# Altium PCB STM32 INC.PcbDoc
Units mm, origin at the board's own origin, x right, y up, seen from the top; angles counter-clockwise.
Board outline 127 x 70.87 mm, 2 copper layers (Top Layer, Bottom Layer); 66 components, 57 nets, 239 pads, 24 vias.
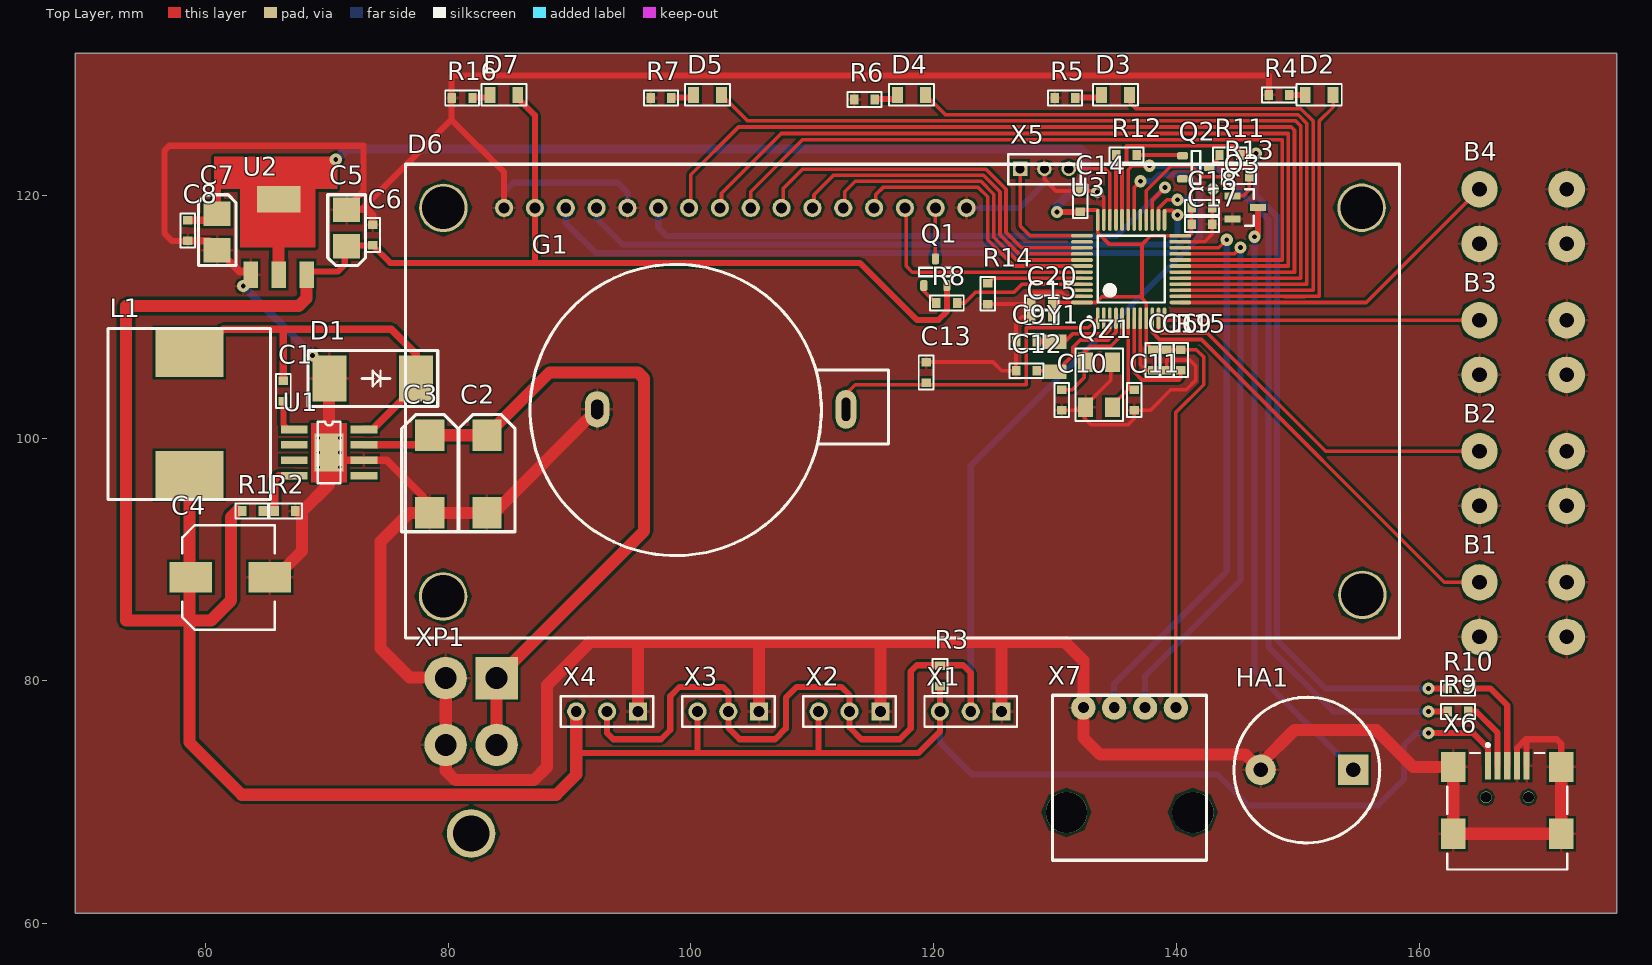
[diagram p0: Top Layer view]
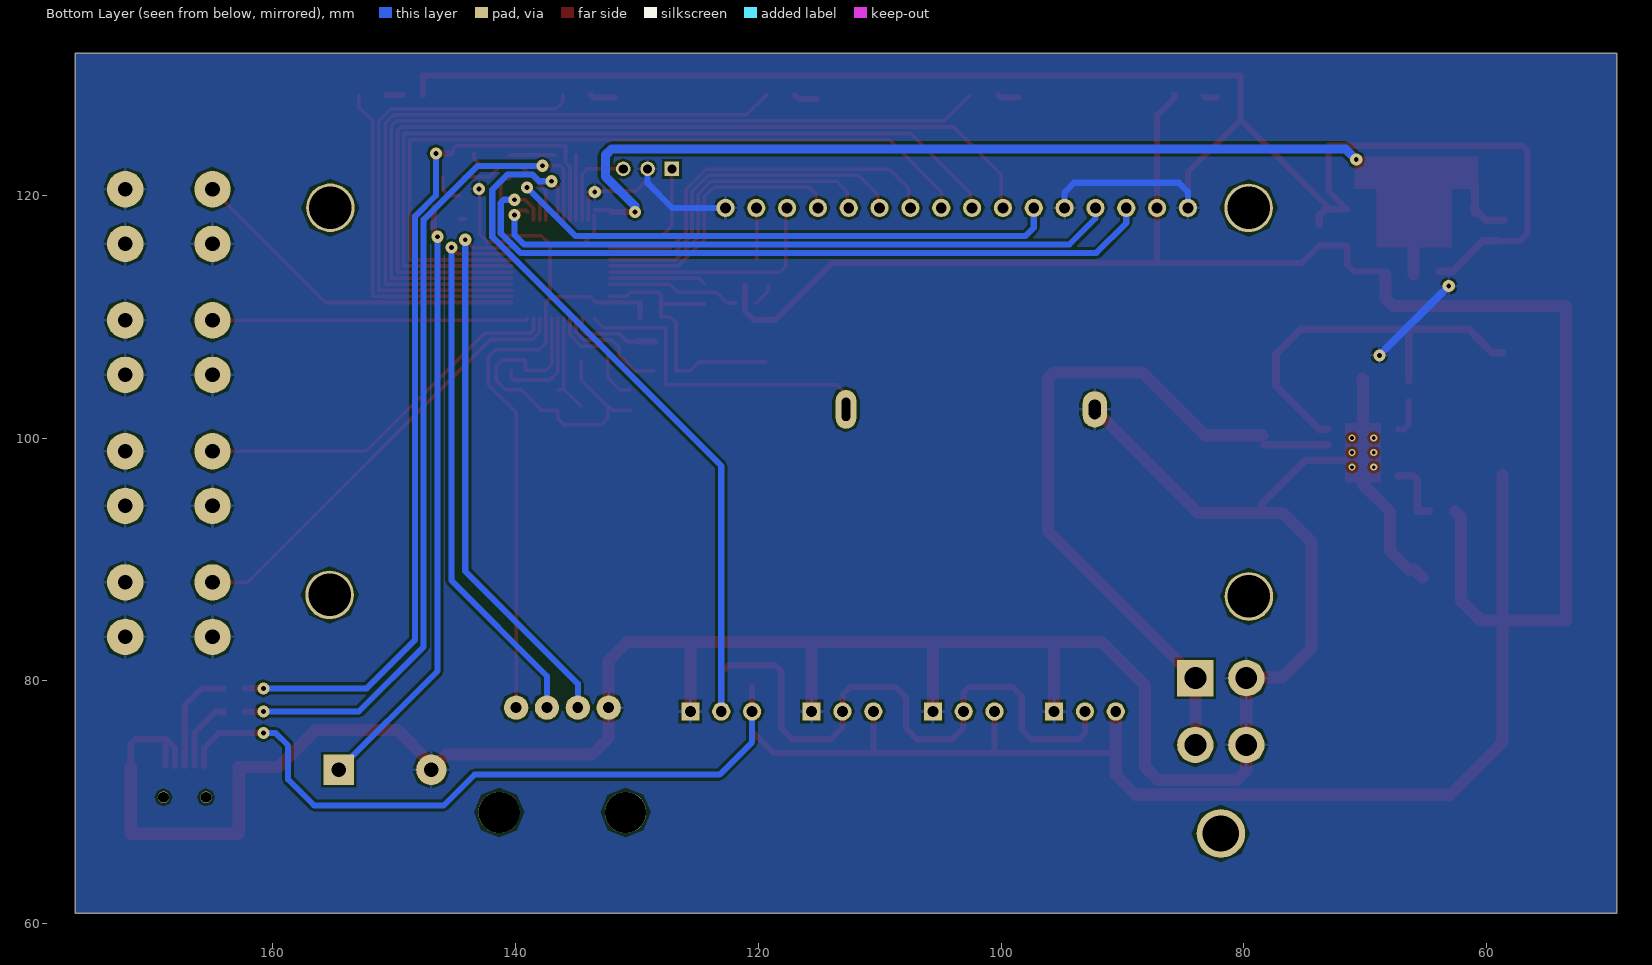
[diagram p1: Bottom Layer view, seen from below]

## Layer stack, top to bottom
Top Layer: signal copper 0.0356
Dielectric: dielectric 0.32, FR-4, Dk 4.8
Bottom Layer: signal copper 0.0356

## Board outline
49.276,60.833 49.276,131.699 176.276,131.699 176.276,60.833

## Design rules (kind name [scope] priority, off if disabled: settings)
Clearance [All] p1: gap=0.2
PolygonConnect [All] p1: connectstyle=Relief reliefconductorwidth=0.254 reliefentries=4 polygonreliefangle="90 Angle"
RoutingVias [All] p1: holewidth=0.711 width=1.27 viastyle="Through Hole" minholewidth=0.711 minwidth=1.27 maxholewidth=0.711 maxwidth=1.27
SilkscreenOverComponentPads [All] p1: minsilkscreentomaskgap=0.254
SolderMaskExpansion [All] p1: expansion=0.102
Width [All] p1: maxlimit=1 minlimit=0.254 preferedwidth=0.3
27 further rules are at their usual default settings.

## Classes and differential pairs
component class "STM32 INC": B1 B2 B3 B4 C1 C2 C3 C4 C8 C9 C10 C11 C12 C13 C14 C15 C16 C17 C18 C19 C20 D1 D2 D3 D4 D5 D7 G1 HA1 L1 Q1 Q2 Q3 QZ1 R1 R2 R4 R5 R6 R7 R9 R12 R13 R14 R15 U1 U3 X1 X2 X3 X4 X5 X7 XP1 Y1

## Components (designator, comment, footprint, x,y, rotation, side; value= is the part's Value field where it differs from the comment)
B1 "Button" Button 168.529,85.852 r180 top
B2 "Button" Button 168.529,96.647 r180 top
B3 "Button" Button 168.529,107.442 r180 top
B4 "Button" Button 168.529,118.237 r180 top
C1 "Capacitor" "Capacitor 0603" 66.421,103.886 r90 top
C2 "Capacitor Polar" "Capacitor D case" 83.185,97.028 r270 top
C3 "Capacitor Polar" "Capacitor D case" 78.486,97.028 r270 top
C4 "100uF" "Cap 0810" 58.801,88.519 r0 top
C5 "Capacitor Polar" "Capacitor B case" 71.628,117.297 r90 top
C6 "Capacitor" "Capacitor 0603" 73.787,116.713 r270 top
C7 "Capacitor Polar" "Capacitor B case" 60.96,116.967 r270 top
C8 "Capacitor" "Capacitor 0603" 58.547,117.094 r90 top
C9 "Capacitor" "Capacitor 0603" 127.635,107.95 r0 top
C10 "Capacitor" "Capacitor 0603" 130.556,103.124 r270 top
C11 "Capacitor" "Capacitor 0603" 136.525,103.124 r270 top
C12 "Capacitor" "Capacitor 0603" 127.635,105.537 r0 top
C13 "Capacitor" "Capacitor 0603" 119.38,105.41 r270 top
C14 "Capacitor" "Capacitor 0603" 132.08,119.507 r270 top
C15 "Capacitor" "Capacitor 0603" 128.905,109.982 r0 top
C16 "Capacitor" "Capacitor 0603" 138.068,106.426 r90 top
C17 "Capacitor" "Capacitor 0603" 142.113,117.602 r180 top
C18 "Capacitor" "Capacitor 0603" 142.113,118.999 r180 top
C19 "Capacitor" "Capacitor 0603" 139.211,106.426 r90 top
C20 "Capacitor" "Capacitor 0603" 128.905,111.125 r0 top
D1 "Diode schottky" SMC 77.343,104.902 r180 top
D2 "RED" "LED0805 RED" 151.765,128.27 r180 top
D3 "BLU" "LEDBLUE 00805" 134.969,128.27 r180 top
D4 "YEL" "LED0805 YELLOW" 118.174,128.27 r180 top
D5 "GRN" "LED0805 GREEN" 101.378,128.27 r180 top
D6 "LCD1602" LCD1602 117.094,100.838 r0 top
D7 "LED" "LED0805 GREEN" 84.582,128.27 r180 top
G1 "lithium 3V" "Battery li-ion CR2032" 100.457,102.362 r0 top
HA1 "Buzzer" Buzzer 150.749,72.644 r0 top
L1 "Inductor" B82477 58.674,101.981 r270 top
Q1 "IRLML6401" SOT23-3_3,0x1,6x0,95 120.142,113.665 r0 top
Q2 "IRLML6401" SOT23-3_3,0x1,6x0,95 141.605,122.301 r270 top
Q3 "BC807" SOT-23 145.669,118.999 r270 top
QZ1 "8MHz" "KX – 9A" 133.604,104.394 r90 top
R1 "Resistor" "RESistor 0603" 63.881,93.98 r180 top
R2 "Resistor" "RESistor 0603" 66.548,93.98 r180 top
R3 "Resistor" "RESistor 0603" 120.523,80.391 r270 top
R4 "Resistor" "RESistor 0603" 148.463,128.27 r180 top
R5 "Resistor" "RESistor 0603" 130.81,128.016 r180 top
R6 "Resistor" "RESistor 0603" 114.3,127.889 r180 top
R7 "Resistor" "RESistor 0603" 97.536,128.016 r180 top
R8 "Resistor" "RESistor 0603" 121.081,111.125 r0 top
R9 "Resistor" "RESistor 0603" 163.195,77.47 r0 top
R10 "Resistor" "RESistor 0603" 163.195,79.375 r0 top
R11 "Resistor" "RESistor 0603" 144.399,123.317 r0 top
R12 "Resistor" "RESistor 0603" 135.89,123.317 r180 top
R13 "Resistor" "RESistor 0603" 145.161,121.539 r0 top
R14 "Resistor" "RESistor 0603" 124.46,111.887 r90 top
R15 "Resistor" "RESistor 0603" 140.354,106.426 r270 top
R16 "Resistor" "RESistor 0603" 81.153,128.016 r0 top
U1 "Tps5430" PSOP8 67.31,100.711 r0 top
U2 "LM1117" SOT-223 66.04,116.586 r0 top
U3 "STM32F103C8T6" LQFP48_N 136.271,113.919 r90 top
X1 "DS18B20" PLS-3-3D 125.595,77.47 r180 top
X2 "DS18B20" PLS-3-3D 115.607,77.47 r180 top
X3 "DS18B20" PLS-3-3D 105.619,77.47 r180 top
X4 "DS18B20" PLS-3-3D 95.631,77.47 r180 top
X5 "PROG" PLS-3-2 127.127,122.174 r270 top
X6 "MUSB" UX60-MB 167.259,65.151 r270 top
X7 "HTU21" Header4_254 136.144,72.009 r180 top
XP1 "12V" MF2x4MRA 82.042,70.739 r180 top
Y1 "32.768" x3215 130.048,107.95 r270 top

## Footprints (in the part's own frame and the unit in brackets; to place one, negate y for a bottom-side part, rotate by r counter-clockwise, add the part's x,y. Pads: shape width x height; smd on the part's side, far side on the other; paste and mask are expansions set on the pad)
B82477 [mm] "Power Inductor"
  rect 4x5.6 smd: 1(-5.05,0) 2(5.05,0)
  silkscreen extent -7.05,-6.7 7.05,6.7, body extent -6.15,-6.15 6.15,6.15
"Battery li-ion CR2032" [mm]
  oval 1.7x3.2 hole 0.7 slot 1.9 at 90 deg: +(12.319,0)
  oval 2x3 hole 1 slot 1.6 at 90 deg: -(-8.179,0)
  silkscreen extent -13.7,-12.05 15.82,11.95, body extent -13.08,-11.4 15.62,11.35, height 7.55
Button [mm]
  round 3 hole 1.2: 1(3.556,-2.261) 2(3.556,2.235) 3(-3.632,2.235) 4(-3.632,-2.261)
  body extent -4.13,-3.25 4.13,3.25, height 8
Buzzer [mm]
  rect 2.5x2.5 hole 1.2: 1(3.81,0.025)
  round 2.5 hole 1.2: 2(-3.81,0.025)
  silkscreen extent -6,-6 6,6, body extent -6,-6 9.45,6, height 9.65
"Cap 0810" [mm] "Aluminum SMT 8.6x8.6x10mm cap"
  rect 3.5x2.5 smd: 1(0,0) 2(6.5,0)
  silkscreen extent -0.7,-4.3 6.9,4.3, body extent -1.65,-4.25 8.05,4.25, height 10.3
"Capacitor 0603" [mm] "C?"
  rect 0.7x0.8 smd: 1(-0.85,0) 2(0.85,0)
  silkscreen extent -1.4,-0.61 1.4,0.61, body extent -0.8,-0.4 0.8,0.4, height 0.79
"Capacitor B case" [mm]
  rect 2x2.2 smd: 1(-1.5,0) 2(1.5,0)
  silkscreen extent -3.07,-1.55 2.74,1.55, body extent -1.75,-1.4 1.75,1.4, height 1.9
"Capacitor D case" [mm] "Capacitor, SM Tantalum; Body 7.3 x 4.3 mm (LxW typ)"
  rect 2.6x2.4 smd: 1(-3.2,0) 2(3.2,0)
  silkscreen extent -4.9,-2.31 4.75,2.31, body extent -3.65,-2.15 3.65,2.15, height 2.8
Header4_254 [mm]
  round 3.4 hole 3.4: 0(-5.21,2.861) 0(5.21,2.861)
  round 2 hole 0.89: 1(-3.81,-5.779) 2(-1.27,-5.779) 3(1.27,-5.779) 4(3.81,-5.779)
  silkscreen extent -6.35,-6.79 6.35,6.8, body extent -6.35,-6.79 6.35,6.79, height 2.27
"KX – 9A" [mm]
  rect 1.6x1.25 smd: 1(-1.854,-1.117) 2(1.846,-1.117) 3(1.846,1.083) 4(-1.854,1.083)
  silkscreen extent -3,-2.01 2.97,1.93, body extent -2.5,-1.6 2.5,1.6, height 1.01
LCD1602 [mm]
  round 1.5 hole 0.9: 1(-32.487,18.12) 2(-29.947,18.12) 3(-27.407,18.12) 4(-24.867,18.12) 5(-22.327,18.12) 6(-19.787,18.12) 7(-17.247,18.12) 8(-14.707,18.12) 9(-12.167,18.12) 10(-9.627,18.12) 11(-7.087,18.12) 12(-4.547,18.12) 13(-2.007,18.12) 14(0.533,18.12) 15(3.073,18.12) 16(5.613,18.12)
  round 4 hole 3.5: NoNet(-37.516,-13.894) NoNet(-37.49,18.12) NoNet(38.169,18.135) NoNet(38.227,-13.767)
  silkscreen extent -40.61,-17.3 41.3,21.72, body extent -40.27,-17.02 41,21.31, height 17.7
"LED0805 GREEN" [mm]
  rect 0.9x1.3 smd: 1(-1.15,0) 2(1.15,0)
  silkscreen extent -1.85,-0.89 1.85,0.89, body extent -1.01,-0.62 1.01,0.63, height 1.1
"LED0805 RED" [mm]
  rect 0.9x1.3 smd: 1(-1.15,0) 2(1.15,0)
  silkscreen extent -1.85,-0.89 1.85,0.89, body extent -1.01,-0.62 1.01,0.63, height 1.1
"LED0805 YELLOW" [mm]
  rect 0.9x1.3 smd: 1(-1.15,0) 2(1.15,0)
  silkscreen extent -1.85,-0.89 1.85,0.89, body extent -1.01,-0.62 1.01,0.63, height 1.1
"LEDBLUE 00805" [mm]
  rect 0.9x1.3 smd: 1(-1.15,0) 2(1.15,0)
  silkscreen extent -1.85,-0.89 1.85,0.89, body extent -1,-0.62 1,0.63, height 0.8
LQFP48_N [mm] "Thin QFP, 48-Leads, Body 7x7mm, Pitch 0.5mm, IPC Medium Density"
  oval 1.8x0.3 smd: 1(-4.05,2.75) 2(-4.05,2.25) 3(-4.05,1.75) 4(-4.05,1.25) 5(-4.05,0.75) 6(-4.05,0.25) 7(-4.05,-0.25) 8(-4.05,-0.75) 9(-4.05,-1.25) 10(-4.05,-1.75) 11(-4.05,-2.25) 12(-4.05,-2.75) 25(4.05,-2.75) 26(4.05,-2.25) 27(4.05,-1.75) 28(4.05,-1.25) 29(4.05,-0.75) 30(4.05,-0.25) 31(4.05,0.25) 32(4.05,0.75) 33(4.05,1.25) 34(4.05,1.75) 35(4.05,2.25) 36(4.05,2.75)
  oval 0.3x1.8 smd: 13(-2.75,-4.05) 14(-2.25,-4.05) 15(-1.75,-4.05) 16(-1.25,-4.05) 17(-0.75,-4.05) 18(-0.25,-4.05) 19(0.25,-4.05) 20(0.75,-4.05) 21(1.25,-4.05) 22(1.75,-4.05) 23(2.25,-4.05) 24(2.75,-4.05) 37(2.75,4.05) 38(2.25,4.05) 39(1.75,4.05) 40(1.25,4.05) 41(0.75,4.05) 42(0.25,4.05) 43(-0.25,4.05) 44(-0.75,4.05) 45(-1.25,4.05) 46(-1.75,4.05) 47(-2.25,4.05) 48(-2.75,4.05)
  silkscreen extent -4.17,-2.75 2.75,3.57, body extent -3.5,-3.5 3.5,3.5, height 1.6
MF2x4MRA [mm]
  round 4 hole 3: 0(0.149,3.323)
  rect 3.5x3.5 / inner rect 1.2x2.5 / far side rect 3x3 hole 1.8: 1(-1.951,-9.477)
  round 3.5 / inner oval 1.2x2.5 / far side round 3 hole 1.8: 2(-1.951,-3.977) 3(2.249,-9.477) 4(2.249,-3.977)
  body extent -5,-9.97 5,9.97, height 11.4
PLS-3-2 [mm] "Connector; Header; 1x3 Position"
  rect 1.2x1.2 hole 0.75: 1(0,0)
  round 1.2 hole 0.75: 2(0,2) 3(0,4)
  silkscreen extent -1.2,-1 1.25,5, body extent -1.2,-1 1.2,5, height 5.5
PLS-3-3D [mm] "Connector; Header; 3 Position"
  rect 1.5x1.5 hole 0.9: 1(0,0)
  round 1.5 hole 0.9: 2(2.54,0) 3(5.08,0)
  silkscreen extent -1.27,-1.27 6.35,1.27, body extent -1.27,-1.27 6.35,1.27, height 8.44
PSOP8 [mm]
  rect 2.2x0.64 smd: 1(0,0) 2(0,-1.27) 3(0,-2.54) 4(0,-3.81) 5(5.75,-3.81) 6(5.75,-2.54) 7(5.75,-1.27) 8(5.75,0)
  rect 2.4x3.1 smd: 9(2.875,-1.905)
  Top Layer region: 1.4,-4.355 4.35,-4.355 4.35,0.545 1.4,0.545
  silkscreen extent 1.93,-4.44 3.82,0.64, body extent -1.2,-4.54 6.95,0.73, height 1.7
"RESistor 0603" [mm]
  rect 0.7x0.8 smd: 1(-0.85,0) 2(0.85,0)
  silkscreen extent -1.4,-0.61 1.4,0.61, body extent -0.85,-0.4 0.85,0.4, height 0.56
SMC [mil]
  rect 110x150 smd: 1(0,0) 2(280.98,0)
  silkscreen extent -71,-91 350,91, body extent -76,-96 355,96, height 102
SOT23-3_3,0x1,6x0,95 [mm]
  rrect50% 0.6x0.9 smd: 1(-0.95,-1.1) 2(0.95,-1.1) 3(0,1.1)
  silkscreen extent -1.35,-0.35 1.35,0.35, body extent -1.46,-1.17 1.46,1.17, height 1.4
SOT-23 [mm]
  rect 0.6x1.3 smd: 1(-0.95,-1.05) 2(0.95,-1.05) 3(0,1.05)
  silkscreen extent -1.92,-1.17 1.5,0.7, body extent -1.5,-1.15 1.5,1.15, height 1.1
SOT-223 [mm]
  rect 1.2x2.2 smd: 1(-2.31,-3.124) 2(-0.01,-3.124) 3(2.29,-3.124)
  rect 3.6x2.2 smd: 4(-0.01,3.076)
  body extent -3.25,-3.48 3.25,3.48, height 1.66
UX60-MB [mm] "Connector; USB2.0, Type B, SM; 5 Position; Right Angle"
  rect 2.3x0.5 smd: 1(-7.85,-1.6) 2(-7.85,-0.8) 3(-7.85,0) 4(-7.85,0.8) 5(-7.85,1.6)
  rect 2.5x2 smd: 6(-7.75,4.45) 7(-2.25,4.45) 8(-7.75,-4.45) 9(-2.25,-4.45)
  round 0.95 hole 0.9 unplated: MH1(-5.25,1.75) MH2(-5.25,-1.75)
  silkscreen extent -9.67,-4.95 0.7,4.95, body extent -8.82,-5.1 0.42,4.8, height 3.93
x3215 [mm] "crystal oscillator 32kHz"
  rect 1.2x1.8 smd: 0(0,0) 1(2.5,0)
  body extent -0.41,-0.76 2.81,0.76, height 0.91

## Part data
C2 C3 C5 C7: library part "Cap Pol", "Polarized Capacitor (Axial)"
C4: library part CAP0810Alu, "Capacitor"
D1: "Schottky Rectifier"
D2 D3 D4 D5: library part LED, "Typical INFRARED GaAs LED"
D7: "Typical INFRARED GaAs LED"
Q1 Q2: library part IRLML6401TRPBF, "P-MOSFET"
QZ1: library part KX-7
U1: library part TPS5430, "tps5430"
U2: library part lm1117, "Linear regulator"
U3: "STM32 ARM-based 32-bit MCU with 64 Kbytes Flash, 48-pin LQFP, Industrial Temperature"
X1 X2 X3 X4: library part PLS-3, "Header, 3-Pin"
X5: library part PLS2-3, "Header, 3-Pin"
X6: library part USB_Mini, "mini USB"
X7: library part "Header4_2.54.AMP  5-103673-3"
XP1: library part MF2x2MRA
Y1: library part Y_3215, "Crystal Oscillator"

## Via types
v1: diameter 1, hole 0.4, Top Layer to Bottom Layer, 18 vias
v2: diameter 0.6, hole 0.3, Top Layer to Bottom Layer, 6 vias

## Nets (pads, with @x,y where several pads share a name; then routed paths per layer and width w, separated by ;. In a path a pad name is that pad's centre, name@x,y a point inside that pad or via, vN(x,y) a via of type N, cw(c..) or ccw(c..) an arc to the next point about the centre after c; other vN are vias at no path point)
CONTRAST: D6.3 U3.26 | length 61
  Top Layer w0.3: U3.26 138.521,118.926 139.229,119.634 v1(140.081,119.634)
  Bottom Layer w0.5: D6.3 89.687,117.704 92.14,115.251 139.609,115.251 141.224,116.866 141.224,119.38 140.97,119.634 v1(140.081,119.634)
E: D6.6 U3.27 | length 48.4
  Top Layer w0.3: U3.27 138.021,119.606 v1(139.065,120.65)
  Bottom Layer w0.5: D6.6 97.307,117.323 97.979,116.651 135.066,116.651 v1(139.065,120.65)
GND: B1.2 B1.3 B1.4 B2.2 B2.3 B2.4 B3.2 B3.3 B3.4 B4.2 B4.3 B4.4 C2.2 C3.2 C4.2 C5.2 C6.1 C7.2 C8.1 C9.1 C10.2 C11.2 C12.1 C13.1 C14.1 C15.1 C16.1 C17.1 C18.1 C19.1 C20.1 D1.2 D6.1 D6.5 D6.16 G1.- HA1.2 Q3.2 QZ1.2 QZ1.4 R2.1 R4.2 R5.2 R6.2 R7.2 R14.1 R16.1 U1.6 U1.9 U2.1 U3.8 U3.23 U3.35 U3.47 X1.1 X2.1 X3.1 X4.1 X5.2 X6.4 X6.5 X6.6 X6.7 X6.8 X6.9 X7.4 XP1.3 XP1.4 | length 461.9
  Top Layer w0.3: C13.1 124.88,106.26 125.603,105.537 C12.1 C9.1 126.785,109.513 127.254,109.982 C15.1@127.871,109.982 ; R14.1 127.967,111.037 C20.1@128.017,111.087 ; C15.1 C15.1@127.871,109.982 ; C20.1 C20.1@128.017,111.087 ; X5.2 129.127,121.317 130.087,120.357 C14.1 133.516,120.357 134.021,119.852 U3.35 ; C10.2 132.001,102.274 QZ1.4@132.394,102.667 ; U3.47 130.892,111.669 130.547,112.014 128.27,112.014 128.017,111.761 C20.1@128.017,111.087 ; QZ1.2@134.594,106.367 134.594,104.749 132.394,102.549 132.394,101.667 132.969,101.092 136.017,101.092 136.525,101.6 C11.2 137.834,102.274 139.534,103.974 140.804,103.974 141.605,104.775 141.605,105.918 141.097,106.426 139.211,106.426 C19.1 C16.1 137.502,105.576 137.021,106.057 U3.8 ; U3.23 142.331,116.169 142.963,116.801 C17.1 C18.1 142.963,120.484 v1(143.002,120.523) ; Q3.2@144.211,118.049 Q3.2 ; C15.1@127.871,109.982 128.017,110.128 C20.1@128.017,111.087
  Top Layer w0.5: 59.055,116.244 C8.1 57.238,116.244 56.642,116.84 56.642,123.698 57.023,124.079 73.025,124.079 73.025,120.372 71.501,118.848 72.874,118.848 80.264,126.238 ; D6.1@84.607,119.085 84.607,121.895 80.264,126.238 ; R4.2 147.613,129.882 80.264,129.882 80.264,126.238 ; B4.2 B4.2@166.04,116.002 ; X6.4 168.059,74.46 168.783,75.184 ; X6.5 168.859,75.108 168.783,75.184 ; X6.6 171.709,74.798 171.323,75.184 168.783,75.184
  Top Layer w0.635: 59.055,116.244 60.31,116.244 62.838,113.716 U2.1@63.857,113.716 ; U1.9 70.485,98.806 71.12,98.171 U1.6 74.93,98.171 78.486,94.615 C3.2 ; 72.874,118.848 73.303,118.848 73.787,118.364 C6.1
  Top Layer w1: C4.2 65.936,89.154 66.421,89.154 67.945,90.678 67.945,93.936 70.185,96.176 U1.9 70.185,104.881 D1.2 ; G1.- 83.744,93.828 C2.2 C3.2 76.786,93.828 74.422,91.464 74.422,82.677 76.835,80.264 79.746,80.264 XP1.3 XP1.4 79.793,72.607 80.588,71.812 87.052,71.812 88.138,72.898 88.138,79.629 91.694,83.185 105.664,83.185 ; X4.1 95.631,83.185 ; X3.1 105.619,83.14 105.664,83.185 ; X2.1 115.607,83.095 115.697,83.185 ; X1.1 125.595,83.066 125.476,83.185 ; X6.8@162.809,72.39 X6.9 X6.7 X6.6 ; X6.8 159.509,72.901 156.464,75.946 149.733,75.946 146.939,73.152 HA1.2 145.694,73.914 133.731,73.914 132.334,75.311 X7.4 132.334,81.661 130.81,83.185 125.476,83.185 ; 105.664,83.185 115.697,83.185 ; 115.697,83.185 125.476,83.185
  Bottom Layer w0.5: D6.1 84.607,120.294 85.344,121.031 93.98,121.031 94.767,120.244 D6.5 ; D6.16 127.112,118.958 129.127,120.974 X5.2
  Bottom Layer w0.635: v1(63.119,112.522) v1(68.834,106.807)
  other v1: 133.477,120.269
NetB1_1: B1.1 U3.10 | length 36.6
  Top Layer w0.3: U3.10 138.021,108.705 138.607,108.119 142.071,108.119 162.077,88.113 B1.1
NetB1_2: 
NetB2_1: B2.1 U3.11 | length 31.6
  Top Layer w0.3: U3.11 138.521,108.912 138.814,108.619 142.587,108.619 152.298,98.908 B2.1
NetB3_1: B3.1 U3.12 | length 26
  Top Layer w0.3: U3.12 139.187,109.703 B3.1
NetB4_1: B4.1 U3.13 | length 28.5
  Top Layer w0.3: U3.13 140.325,111.165 155.64,111.165 B4.1
NetC1_1: C1.1 U1.1 | length 3
  Top Layer w0.5: C1.1 66.421,101.092 66.802,100.711 U1.1
NetC1_2: C1.2 D1.1 L1.1 U1.8 | length 32.8
  Top Layer w0.635: L1.1 59.533,107.031 60.579,108.077 61.468,108.966 75.311,108.966 77.343,106.934 77.343,105.664 D1.1 77.343,104.267 73.787,100.711 U1.8 ; C1.2 66.421,108.839
NetC9_2: C9.2 U3.3 Y1.0 | length 7.4
  Top Layer w0.3: Y1.0 130.818,107.95 131.445,108.577 134.186,108.577 134.521,108.912 U3.3
  Top Layer w0.5: C9.2 Y1.0
NetC10_1: C10.1 QZ1.3 U3.5 | length 9.2
  Top Layer w0.3: C10.1 131.406,103.974 132.394,104.962 QZ1.3@132.394,106.367 ; QZ1.3@132.394,106.621 132.394,107.046 132.917,107.569 134.592,107.569 135.521,108.498 U3.5
NetC11_1: C11.1 QZ1.1 U3.6 | length 8.4
  Top Layer w0.3: QZ1.1@134.594,102.667 134.66,102.667 136.021,104.028 ; U3.6 136.021,104.028 ; C11.1@136.525,103.924 136.421,104.028 136.021,104.028
NetC12_2: C12.2 U3.4 Y1.1 | length 9.3
  Top Layer w0.3: C12.2@128.612,105.537 129.961,105.537 Y1.1 130.088,105.45 131.445,106.807 131.445,107.442 132.08,108.077 134.393,108.077 135.021,108.705 U3.4
NetC13_2: C13.2 G1.+ U3.1 | length 27.4
  Top Layer w0.3: G1.+ 112.776,103.632 113.538,104.394 127.635,104.394 127.635,109.093 132.745,109.093 U3.1
NetD2_1: D2.1 U3.14 | length 28.5
  Top Layer w0.3: U3.14 148.896,111.669 148.9,111.665 150.557,111.665 150.561,111.669 151.765,111.669 151.765,126.111 152.915,127.261 D2.1
NetD2_2: D2.2 R4.1 | length 1.3
  Top Layer w0.5: R4.1 D2.2
NetD3_1: D3.1 U3.15 | length 41.3
  Top Layer w0.3: D3.1 136.119,127.66 136.652,127.127 150.249,127.127 151.265,126.111 151.265,112.169 150.354,112.169 150.35,112.165 149.108,112.165 149.104,112.169 U3.15
NetD3_2: D3.2 R5.1 | length 2.1
  Top Layer w0.5: R5.1@131.826,128.055 133.604,128.055 D3.2
NetD4_1: D4.1 U3.16 | length 56.1
  Top Layer w0.3: D4.1 120.966,126.627 150.042,126.627 150.749,125.92 150.749,112.669 150.147,112.669 150.143,112.665 149.315,112.665 149.311,112.669 U3.16
NetD4_2: D4.2 R6.1 | length 2
  Top Layer w0.5: R6.1@115.189,127.928 116.682,127.928 D4.2
NetD5_1: D5.1 U3.17 | length 71.2
  Top Layer w0.3: D5.1 104.67,126.127 149.835,126.127 150.229,125.733 150.229,113.169 149.94,113.169 149.936,113.165 149.522,113.165 149.518,113.169 U3.17
NetD5_2: D5.2 R7.1 | length 1.8
  Top Layer w0.5: R7.1@98.552,128.055 100.013,128.055 D5.2
NetD6_7: D6.7 U3.18 | length 75.3
  Top Layer w0.3: D6.7@99.974,118.958 99.974,121.691 103.91,125.627 149.455,125.627 149.729,125.353 149.729,113.673 149.725,113.669 U3.18
NetD6_8: D6.8 U3.19 | length 69.8
  Top Layer w0.3: D6.8@102.514,118.958 102.514,120.167 107.442,125.095 149.225,125.095 149.225,114.169 U3.19
NetD6_9: D6.9 U3.20 | length 65.2
  Top Layer w0.3: D6.9 104.927,120.294 109.22,124.587 148.725,124.587 148.725,114.681 148.713,114.669 U3.20
NetD6_10: D6.10 U3.39 | length 31.6
  Top Layer w0.3: D6.10@107.594,118.958 107.594,120.548 109.196,122.15 124.304,122.15 125.96,120.494 125.96,116.953 127.244,115.669 U3.39
NetD6_11: D6.11 U3.40 | length 28.6
  Top Layer w0.3: D6.11@110.134,118.958 110.134,120.04 111.744,121.65 124.097,121.65 125.46,120.287 125.46,116.746 127.037,115.169 U3.40
NetD6_12: D6.12 U3.41 | length 26
  Top Layer w0.3: D6.12@112.674,118.958 112.674,120.294 113.53,121.15 123.89,121.15 124.96,120.08 124.96,116.539 126.83,114.669 U3.41
NetD6_13: D6.13 U3.42 | length 23.1
  Top Layer w0.3: D6.13@115.214,118.958 115.214,120.04 115.824,120.65 123.683,120.65 124.46,119.873 124.46,116.332 126.623,114.169 U3.42
NetD6_14: D6.14 U3.43 | length 19.5
  Top Layer w0.3: D6.14@117.754,118.958 117.754,114.148 118.233,113.669 U3.43
NetD6_15: D6.15 Q1.3 | length 4.2
  Top Layer w0.3: Q1.3 120.142,118.933 D6.15
NetD7_2: D7.2 R16.2 | length 1.3
  Top Layer w0.3: D7.2@83.217,128.055 D7.2
  Top Layer w0.5: R16.2@82.218,128.055 D7.2@83.217,128.055
NetHA1_1: HA1.1 Q3.3 | length 50.9
  Top Layer w0.5: v1(146.431,116.586) 146.719,116.874 Q3.3
  Bottom Layer w0.5: v1(146.431,116.586) 146.431,80.797 HA1.1 ; HA1.1@154.559,73.431 HA1.1@155.321,72.669
NetQ1_1: Q1.1 R8.1 | length 1.8
  Top Layer w0.3: Q1.1 119.192,112.114 R8.1@120.181,111.125
NetQ2_1: Q2.1 R12.1 | length 3.8
  Top Layer w0.3: R12.1 140.439,123.317 Q2.1
NetQ2_3: Q2.3 R11.1 | length 1.4
  Top Layer w0.3: Q2.3 143.422,123.018 R11.1@143.422,123.444
NetQ3_1: Q3.1 R13.2 | length 2.7
  Top Layer w0.3: Q3.1 145.5,119.949 146.011,120.46 R13.2
NetR1_1: R1.1 R2.2 U1.4 | length 5.3
  Top Layer w0.635: R1.1 R2.2 65.698,96.559 66.04,96.901 U1.4
NetR3_1: R3.1 U3.30 X1.2 X2.2 X3.2 X4.2 | length 114.1
  Top Layer w0.3: U3.30 136.521,120.646 v1(137.033,121.158)
  Top Layer w0.5: X4.2 93.091,75.692 93.599,75.184 97.536,75.184 98.298,75.946 98.298,78.74 99.06,79.502 102.616,79.502 103.079,79.039 X3.2 103.079,76.118 104.013,75.184 106.934,75.184 107.823,76.073 107.823,78.613 108.712,79.502 112.395,79.502 113.067,78.83 X2.2 113.067,76.163 114.046,75.184 117.221,75.184 118.11,76.073 118.11,80.772 118.618,81.28 122.428,81.28 123.055,80.653 X1.2
  Bottom Layer w0.5: X1.2 123.055,97.707 141.924,116.576 141.924,120.458 140.654,121.728 138.619,121.728 138.049,121.158 v1(137.033,121.158)
NetR8_2: R8.2 U3.45 | length 11
  Top Layer w0.3: R8.2@121.881,111.125 122.555,111.125 123.444,112.014 126.619,112.014 127.274,112.669 U3.45
NetR9_1: R9.1 U3.31 | length 69.8
  Top Layer w0.3: U3.31 136.021,122.106 136.343,122.428 v1(137.795,122.428)
  Top Layer w0.5: v1(160.782,77.47) R9.1
  Bottom Layer w0.5: v1(137.795,122.428) 143.129,122.428 147.574,117.983 147.574,82.804 152.908,77.47 v1(160.782,77.47)
NetR10_1: R10.1 R11.2 U3.32 | length 73.3
  Top Layer w0.3: U3.32 135.521,122.313 135.89,122.682 135.89,124.067 144.919,124.067 145.122,123.864 R11.2@145.122,123.61
  Top Layer w0.5: R11.2@145.288,123.444 v1@146.265,123.444 ; v1(160.782,79.375) R10.1
  Bottom Layer w0.5: v1(146.558,123.444) 146.558,119.989 148.274,118.273 148.274,83.374 152.273,79.375 v1(160.782,79.375)
NetR12_2: R12.2 U3.33 | length 5.3
  Top Layer w0.3: U3.33 R12.2@135.021,123.317
NetR13_1: R13.1 U3.28 | length 10.4
  Top Layer w0.3: U3.28 137.521,120.376 139.573,122.428 141.224,122.428 142.113,121.539 R13.1
NetR14_2: R14.2 U3.44 | length 7.9
  Top Layer w0.3: R14.2 124.892,113.169 U3.44
NetR15_2: R15.2 U3.7 | length 9.3
  Top Layer w0.3: U3.7 136.521,105.414 137.16,104.775 140.208,104.775 140.354,104.921 R15.2
RS: D6.4 U3.25 | length 52.8
  Top Layer w0.3: U3.25@139.021,118.633 139.133,118.745 139.7,118.745 v1(140.081,118.364)
  Bottom Layer w0.5: D6.4 92.227,118.085 94.361,115.951 139.319,115.951 140.081,116.713 v1(140.081,118.364)
SCL: U3.21 X7.2 | length 46.7
  Top Layer w0.3: U3.21 144.76,115.169 v1(145.288,115.697) v1@145.542,115.697
  Bottom Layer w0.5: X7.2 137.414,80.391 145.288,88.265 145.288,115.443 v1@145.542,115.697
SDA: U3.22 X7.3 | length 46.2
  Top Layer w0.3: U3.22 143.482,115.669 v1(144.145,116.332)
  Bottom Layer w0.5: X7.3 134.874,79.756 144.145,89.027 v1@144.145,116.078
SWCLK: U3.37 X5.1 | length 10.1
  Top Layer w0.3: X5.1 127.127,117.475 127.933,116.669 U3.37
SWDIO: U3.34 X5.3 | length 7.4
  Top Layer w0.3: X5.3 134.112,122.174 134.521,121.765 U3.34
USB_M: R9.2 X6.2 | length 6
  Top Layer w0.5: R9.2@164.045,77.343 R9.2@164.172,77.47 ; R9.2 R9.2@164.172,77.47 ; X6.2 166.459,75.73 164.719,77.47 R9.2@164.172,77.47
USB_P: R10.2 X6.3 | length 8.8
  Top Layer w0.5: R10.2 165.862,79.375 167.259,77.978 X6.3
VCC3.3V: C7.1 C8.2 C14.2 C15.2 C16.2 C17.2 C18.2 C19.2 C20.2 Q2.2 R15.1 U2.2 U2.4 U3.9 U3.24 U3.36 U3.48 X7.1 | length 151.4
  Top Layer w0.3: C20.2 129.799,111.169 U3.48 133.394,111.169 133.858,111.633 137.033,111.633 137.16,111.506 ; C14.2@132.08,118.784 U3.36@133.482,118.784 ; U3.36@133.521,118.398 U3.36 133.521,116.923 134.493,115.951 137.16,115.951 ; X7.1 139.954,102.108 142.24,104.394 142.24,106.68 141.644,107.276 R15.1 C16.2 137.521,107.823 U3.9 137.521,111.145 137.16,111.506 ; Q2.2 140.904,121.351 141.224,121.031 141.224,116.84 141.053,116.669 U3.24 137.878,116.669 137.16,115.951 ; 137.16,111.506 137.16,115.951
  Top Layer w0.5: C15.2 C20.2 ; v1(130.175,118.618) C14.2@132.041,118.618
  Top Layer w0.635: C8.2 60.056,117.944 C7.1@60.96,118.848 ; C7.1 C7.1@60.96,118.848 ; C7.1@61.083,118.971 C7.1@60.96,118.848 ; 61.976,121.793 60.96,120.777 C7.1@60.96,118.848
  Top Layer w1: U2.2 U2.4
  Bottom Layer w0.75: v1(70.739,122.936) 71.628,123.825 132.08,123.825 132.588,123.317 132.588,121.539 130.175,119.126 v1(130.175,118.618)
VCC5V: C4.1 C5.1 C6.2 D6.2 D7.1 L1.2 Q1.2 R1.2 R3.2 U2.3 X1.3 X2.3 X3.3 X4.3 X6.1 | length 292.2
  Top Layer w0.5: U2.3@68.457,113.716 70.917,113.716 71.477,114.276 71.477,115.824 71.516,115.863 C6.2 75.223,114.427 87.122,114.427 ; D7.1 85.732,128.009 87.147,126.594 87.147,114.452 87.122,114.427 ; 90.424,74.041 100.457,74.041 ; X3.3 100.539,74.123 100.457,74.041 ; X2.3 110.527,74.078 110.49,74.041 ; R3.2 120.523,77.478 X1.3 120.515,75.811 118.745,74.041 110.49,74.041 ; Q1.2 121.081,112.554 121.081,110.413 120.396,109.728 118.618,109.728 113.919,114.427 87.122,114.427 ; v1(160.782,75.692) 164.465,75.692 165.659,74.498 X6.1 ; 100.457,74.041 110.49,74.041
  Top Layer w1: 58.166,84.963 53.467,84.963 53.467,110.871 67.691,110.871 68.33,111.51 U2.3 ; L1.2 58.674,84.963 ; 62.611,93.98 62.103,93.472 62.103,86.614 60.452,84.963 58.674,84.963 ; X4.3 90.551,72.263 88.9,70.612 62.992,70.612 58.674,74.93 58.674,84.963
  Bottom Layer w0.5: X1.3 120.515,74.938 123.19,72.263 143.383,72.263 145.923,69.723 156.591,69.723 158.75,71.882 158.75,74.676 159.766,75.692 v1(160.782,75.692)
VCC12V: C2.1 C3.1 U1.7 XP1.1 XP1.2 | length 60.5
  Top Layer w0.635: U1.7 C3.1@78.359,99.441
  Top Layer w1: C3.1 C2.1 88.367,105.41 95.631,105.41 96.139,104.902 96.139,92.329 83.993,80.183 XP1.2
pads on no net: D6.NoNet U1.2 U1.3 U1.5 U3.2 U3.29 U3.38 U3.46 X6.MH1 X6.MH2 X7.0 XP1.0
copper on no net:
  other v2: 69.285,97.606 71.085,97.606 69.285,98.806 71.085,98.806 69.285,100.006 71.085,100.006

## Polygon pours and split planes (outlines as drawn)
GND on Top Layer "Mechanical 2-GND" (solid, remove dead copper, pour order 2): 49.276,60.833 49.276,131.699 176.276,131.699 176.276,60.833 49.276,60.833
GND on Bottom Layer "Mechanical 2-GND" (solid, remove dead copper, pour order 2): 49.276,60.833 49.276,131.699 176.276,131.699 176.276,60.833 49.276,60.833

## Other copper
Top Layer:
  rectangle net VCC3.3V: 60.706,120.523 70.866,123.19
  rectangle net VCC3.3V: 62.865,115.697 69.088,123.063

## Silkscreen, mask and mechanical layers (free items; w line width, h text height)
Mechanical 2:
  the board outline again, w0.254